# Altium PCB LED_PCB.pcbdoc
Units mil, origin at the board's own origin, x right, y up, seen from the top; angles counter-clockwise.
Board outline 1275.59 x 8110.24 mil, 2 copper layers (Top Layer, Bottom Layer); 100 components, 70 nets, 282 pads, 72 vias.
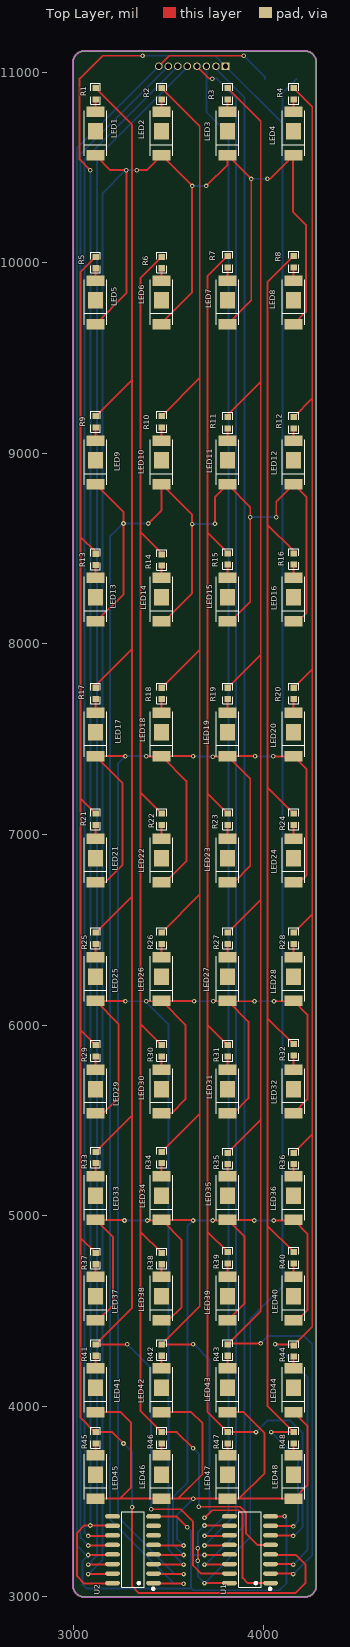
[diagram p0: Top Layer view]
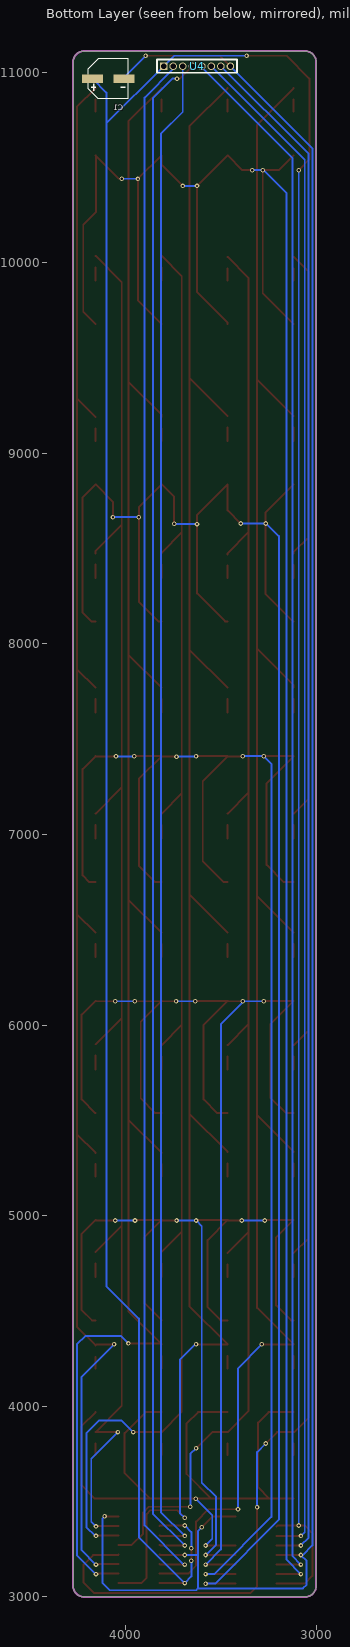
[diagram p1: Bottom Layer view, seen from below]

## Layer stack, top to bottom
Top Solder Mask Layer: solder mask 0.4, Solder Resist, Dk 3.5
Top Layer: signal copper 1.4
Dielectric1: dielectric 12.6, FR-4, Dk 4.8
Bottom Layer: signal copper 1.4
Bottom Solder Mask Layer: solder mask 0.4, Solder Resist, Dk 3.5

## Board outline
3059.06,11110.24 4216.54,11110.24 cw(c4216.54,11051.18) 4275.59,11051.18 4275.59,3059.06 cw(c4216.54,3059.06) 4216.54,3000 3059.06,3000 cw(c3059.06,3059.06) 3000,3059.06 3000,11051.18 cw(c3059.06,11051.18)

## Design rules (kind name [scope] priority, off if disabled: settings)
Clearance [All] p1: gap=10 ignorepadtopadclearanceinfootprint=FALSE except(0: Arc-Hole Track-Hole SMDPad-Hole THPad-Hole Via-Hole Fill-Hole Poly-Hole Region-Hole Text-Hole)
PolygonConnect [All] p1: connectstyle=Relief reliefconductorwidth=10 reliefentries=4 polygonreliefangle="90 Angle" airgapwidth=10
RoutingVias [All] p1: holewidth=28 width=50 viastyle="Through Hole" minholewidth=28 minwidth=50 maxholewidth=28 maxwidth=50
SolderMaskExpansion [All] p1: expansion=4
Width [All] p1: maxlimit=10 minlimit=10 preferedwidth=10
30 further rules are at their usual default settings.

## Components (designator, comment, footprint, x,y, rotation, side; value= is the part's Value field where it differs from the comment)
C1 "EEEFK1H100UR" CAP-SMD_BD5.0-L5.3-W5.3-LS6.0-FD 4090,10964.16 r180 bottom
LED1 "TJ-S5730UG5W9TLC2R-A5" LED-SMD_L5.7-W3.0-R-RD 3118.11,10677.17 r90 top
LED2 "TJ-S5730UG5W9TLC2R-A5" LED-SMD_L5.7-W3.0-R-RD 3464.57,10677.17 r90 top
LED3 "TJ-S5730UG5W9TLC2R-A5" LED-SMD_L5.7-W3.0-R-RD 3811.02,10677.17 r90 top
LED4 "TJ-S5730UG5W9TLC2R-A5" LED-SMD_L5.7-W3.0-R-RD 4157.48,10677.17 r90 top
LED5 "TJ-S5730UG5W9TLC2R-A5" LED-SMD_L5.7-W3.0-R-RD 3118.11,9791.73 r90 top
LED6 "TJ-S5730UG5W9TLC2R-A5" LED-SMD_L5.7-W3.0-R-RD 3464.57,9791.73 r90 top
LED7 "TJ-S5730UG5W9TLC2R-A5" LED-SMD_L5.7-W3.0-R-RD 3811.02,9791.73 r90 top
LED8 "TJ-S5730UG5W9TLC2R-A5" LED-SMD_L5.7-W3.0-R-RD 4157.48,9791.73 r90 top
LED9 "TJ-S5730UG5W9TLC2R-A5" LED-SMD_L5.7-W3.0-R-RD 3118.11,8950.98 r90 top
LED10 "TJ-S5730UG5W9TLC2R-A5" LED-SMD_L5.7-W3.0-R-RD 3464.57,8950.98 r90 top
LED11 "TJ-S5730UG5W9TLC2R-A5" LED-SMD_L5.7-W3.0-R-RD 3811.02,8950.98 r90 top
LED12 "TJ-S5730UG5W9TLC2R-A5" LED-SMD_L5.7-W3.0-R-RD 4157.48,8950.98 r90 top
LED13 "TJ-S5730UG5W9TLC2R-A5" LED-SMD_L5.7-W3.0-R-RD 3118.11,8231.89 r90 top
LED14 "TJ-S5730UG5W9TLC2R-A5" LED-SMD_L5.7-W3.0-R-RD 3464.57,8231.89 r90 top
LED15 "TJ-S5730UG5W9TLC2R-A5" LED-SMD_L5.7-W3.0-R-RD 3811.02,8231.89 r90 top
LED16 "TJ-S5730UG5W9TLC2R-A5" LED-SMD_L5.7-W3.0-R-RD 4157.48,8231.89 r90 top
LED17 "TJ-S5730UG5W9TLC2R-A5" LED-SMD_L5.7-W3.0-R-RD 3118.11,7525.2 r90 top
LED18 "TJ-S5730UG5W9TLC2R-A5" LED-SMD_L5.7-W3.0-R-RD 3464.57,7525.2 r90 top
LED19 "TJ-S5730UG5W9TLC2R-A5" LED-SMD_L5.7-W3.0-R-RD 3811.02,7525.2 r90 top
LED20 "TJ-S5730UG5W9TLC2R-A5" LED-SMD_L5.7-W3.0-R-RD 4157.48,7525.2 r90 top
LED21 "TJ-S5730UG5W9TLC2R-A5" LED-SMD_L5.7-W3.0-R-RD 3118.11,6864.57 r90 top
LED22 "TJ-S5730UG5W9TLC2R-A5" LED-SMD_L5.7-W3.0-R-RD 3464.57,6864.57 r90 top
LED23 "TJ-S5730UG5W9TLC2R-A5" LED-SMD_L5.7-W3.0-R-RD 3811.02,6864.57 r90 top
LED24 "TJ-S5730UG5W9TLC2R-A5" LED-SMD_L5.7-W3.0-R-RD 4157.48,6864.57 r90 top
LED25 "TJ-S5730UG5W9TLC2R-A5" LED-SMD_L5.7-W3.0-R-RD 3118.11,6241.73 r90 top
LED26 "TJ-S5730UG5W9TLC2R-A5" LED-SMD_L5.7-W3.0-R-RD 3464.57,6241.73 r90 top
LED27 "TJ-S5730UG5W9TLC2R-A5" LED-SMD_L5.7-W3.0-R-RD 3811.02,6241.73 r90 top
LED28 "TJ-S5730UG5W9TLC2R-A5" LED-SMD_L5.7-W3.0-R-RD 4157.48,6241.73 r90 top
LED29 "TJ-S5730UG5W9TLC2R-A5" LED-SMD_L5.7-W3.0-R-RD 3118.11,5652.56 r90 top
LED30 "TJ-S5730UG5W9TLC2R-A5" LED-SMD_L5.7-W3.0-R-RD 3464.57,5652.56 r90 top
LED31 "TJ-S5730UG5W9TLC2R-A5" LED-SMD_L5.7-W3.0-R-RD 3811.02,5652.56 r90 top
LED32 "TJ-S5730UG5W9TLC2R-A5" LED-SMD_L5.7-W3.0-R-RD 4157.48,5652.56 r90 top
LED33 "TJ-S5730UG5W9TLC2R-A5" LED-SMD_L5.7-W3.0-R-RD 3118.11,5092.13 r90 top
LED34 "TJ-S5730UG5W9TLC2R-A5" LED-SMD_L5.7-W3.0-R-RD 3464.57,5092.13 r90 top
LED35 "TJ-S5730UG5W9TLC2R-A5" LED-SMD_L5.7-W3.0-R-RD 3811.02,5092.13 r90 top
LED36 "TJ-S5730UG5W9TLC2R-A5" LED-SMD_L5.7-W3.0-R-RD 4157.48,5092.13 r90 top
LED37 "TJ-S5730UG5W9TLC2R-A5" LED-SMD_L5.7-W3.0-R-RD 3118.11,4565.35 r90 top
LED38 "TJ-S5730UG5W9TLC2R-A5" LED-SMD_L5.7-W3.0-R-RD 3464.57,4565.35 r90 top
LED39 "TJ-S5730UG5W9TLC2R-A5" LED-SMD_L5.7-W3.0-R-RD 3811.02,4565.35 r90 top
LED40 "TJ-S5730UG5W9TLC2R-A5" LED-SMD_L5.7-W3.0-R-RD 4157.48,4565.35 r90 top
LED41 "TJ-S5730UG5W9TLC2R-A5" LED-SMD_L5.7-W3.0-R-RD 3118.11,4084.65 r90 top
LED42 "TJ-S5730UG5W9TLC2R-A5" LED-SMD_L5.7-W3.0-R-RD 3464.57,4084.65 r90 top
LED43 "TJ-S5730UG5W9TLC2R-A5" LED-SMD_L5.7-W3.0-R-RD 3811.02,4084.65 r90 top
LED44 "TJ-S5730UG5W9TLC2R-A5" LED-SMD_L5.7-W3.0-R-RD 4157.48,4084.65 r90 top
LED45 "TJ-S5730UG5W9TLC2R-A5" LED-SMD_L5.7-W3.0-R-RD 3118.11,3629.92 r90 top
LED46 "TJ-S5730UG5W9TLC2R-A5" LED-SMD_L5.7-W3.0-R-RD 3464.57,3629.92 r90 top
LED47 "TJ-S5730UG5W9TLC2R-A5" LED-SMD_L5.7-W3.0-R-RD 3811.02,3629.92 r90 top
LED48 "TJ-S5730UG5W9TLC2R-A5" LED-SMD_L5.7-W3.0-R-RD 4157.48,3629.92 r90 top
R1 "0603WAF1100T5E" R0603 3118.11,10885.83 r90 top
R2 "0603WAF1100T5E" R0603 3464.57,10885.83 r90 top
R3 "0603WAF1100T5E" R0603 3811.02,10885.83 r90 top
R4 "0603WAF1100T5E" R0603 4157.48,10885.83 r90 top
R5 "0603WAF1100T5E" R0603 3118.11,10000.24 r90 top
R6 "0603WAF1100T5E" R0603 3464.57,10000.24 r90 top
R7 "0603WAF1100T5E" R0603 3811.02,10005.24 r90 top
R8 "0603WAF1100T5E" R0603 4157.48,10005.24 r90 top
R9 "0603WAF1100T5E" R0603 3118.11,9165.24 r90 top
R10 "0603WAF1100T5E" R0603 3464.57,9165.24 r90 top
R11 "0603WAF1100T5E" R0603 3811.02,9160.24 r90 top
R12 "0603WAF1100T5E" R0603 4157.48,9160.24 r90 top
R13 "0603WAF1100T5E" R0603 3118.11,8443.27 r90 top
R14 "0603WAF1100T5E" R0603 3464.57,8440.24 r90 top
R15 "0603WAF1100T5E" R0603 3811.02,8445.24 r90 top
R16 "0603WAF1100T5E" R0603 4157.48,8445.24 r90 top
R17 "0603WAF1100T5E" R0603 3118.11,7740.24 r90 top
R18 "0603WAF1100T5E" R0603 3464.57,7740.24 r90 top
R19 "0603WAF1100T5E" R0603 3811.02,7740.24 r90 top
R20 "0603WAF1100T5E" R0603 4157.48,7740.24 r90 top
R21 "0603WAF1100T5E" R0603 3118.11,7080.24 r90 top
R22 "0603WAF1100T5E" R0603 3464.57,7080.24 r90 top
R23 "0603WAF1100T5E" R0603 3811.02,7080.24 r90 top
R24 "0603WAF1100T5E" R0603 4157.48,7080.24 r90 top
R25 "0603WAF1100T5E" R0603 3118.11,6455.24 r90 top
R26 "0603WAF1100T5E" R0603 3464.57,6455.24 r90 top
R27 "0603WAF1100T5E" R0603 3811.02,6455.24 r90 top
R28 "0603WAF1100T5E" R0603 4157.48,6455.24 r90 top
R29 "0603WAF1100T5E" R0603 3118.11,5865.24 r90 top
R30 "0603WAF1100T5E" R0603 3464.57,5865.24 r90 top
R31 "0603WAF1100T5E" R0603 3811.02,5865.24 r90 top
R32 "0603WAF1100T5E" R0603 4157.48,5870.24 r90 top
R33 "0603WAF1100T5E" R0603 3118.11,5305.24 r90 top
R34 "0603WAF1100T5E" R0603 3464.57,5305.24 r90 top
R35 "0603WAF1100T5E" R0603 3811.02,5300.24 r90 top
R36 "0603WAF1100T5E" R0603 4157.48,5300.24 r90 top
R37 "0603WAF1100T5E" R0603 3118.11,4775.24 r90 top
R38 "0603WAF1100T5E" R0603 3464.57,4775.24 r90 top
R39 "0603WAF1100T5E" R0603 3811.02,4780.24 r90 top
R40 "0603WAF1100T5E" R0603 4157.48,4780.24 r90 top
R41 "0603WAF1100T5E" R0603 3118.11,4295.24 r90 top
R42 "0603WAF1100T5E" R0603 3464.57,4295.24 r90 top
R43 "0603WAF1100T5E" R0603 3811.02,4295.24 r90 top
R44 "0603WAF1100T5E" R0603 4157.48,4290.24 r90 top
R45 "0603WAF1100T5E" R0603 3118.11,3835.24 r90 top
R46 "0603WAF1100T5E" R0603 3464.57,3835.24 r90 top
R47 "0603WAF1100T5E" R0603 3811.02,3835.24 r90 top
R48 "0603WAF1100T5E" R0603 4157.48,3835.24 r90 top
U1 "74HC595D_C431479" SOIC-16_L9.9-W3.9-P1.27-LS6.0-BL 3928.51,3248.03 r90 top
U2 "74HC595D_C431479" SOIC-16_L9.9-W3.9-P1.27-LS6.0-BL 3315,3248.03 r90 top
U4 "排母1*8P" HDR-TH_8P-P1.27-V-F 3625,11030.24 r180 bottom

## Footprints (in the part's own frame and the unit in brackets; to place one, negate y for a bottom-side part, rotate by r counter-clockwise, add the part's x,y. Pads: shape width x height; smd on the part's side, far side on the other; paste and mask are expansions set on the pad)
CAP-SMD_BD5.0-L5.3-W5.3-LS6.0-FD [mm]
  rect 2.8x1.1 smd mask+0.051: 1(-2.1,0) 2(2.1,0)
  silkscreen extent -2.66,-2.62 2.66,2.65
HDR-TH_8P-P1.27-V-F [mm]
  rect 1x1 hole 0.7 mask+0.051: 1(-4.445,0)
  round 1 hole 0.7 mask+0.051: 2(-3.175,0) 3(-1.905,0) 4(-0.635,0) 5(0.635,0) 6(1.905,0) 7(3.175,0) 8(4.445,0)
  silkscreen extent -5.31,-0.87 5.31,0.92
LED-SMD_L5.7-W3.0-R-RD [mm]
  rect 1.4x2.4 smd mask+0.051: 1(2.9,0) 2(-2.9,0)
  rect 2.2x2 smd mask+0.051: 3(0.3,0)
  silkscreen extent -2.96,-1.5 3.04,1.5
R0603 [mil]
  rect 31.75x34.02 smd paste-3937.01 mask+2: 1(-29.66,0) 2(29.66,0)
  silkscreen extent -55,-26 55,26
SOIC-16_L9.9-W3.9-P1.27-LS6.0-BL [mil]
  oval 23.7x77.6 smd mask+2: 1(-175,-107.7) 2(-125,-107.7) 3(-75,-107.7) 4(-25,-107.7) 5(25,-107.7) 6(75,-107.7) 7(125,-107.7) 8(175,-107.7) 9(175,107.7) 10(125,107.7) 11(75,107.7) 12(25,107.7) 13(-25,107.7) 14(-75,107.7) 15(-125,107.7) 16(-175,107.7)
  silkscreen extent -211,-111 198,60

## Via types
v1: diameter 24, hole 12, Top Layer to Bottom Layer, 72 vias

## Nets (pads, with @x,y where several pads share a name; then routed paths per layer and width w, separated by ;. In a path a pad name is that pad's centre, name@x,y a point inside that pad or via, vN(x,y) a via of type N, cw(c..) or ccw(c..) an arc to the next point about the centre after c; other vN are vias at no path point)
$1N2251: LED1.1 R1.1 | length 64.8
  Top Layer w10: LED1.1 R1.1
$1N2333: LED2.1 R2.1 | length 64.8
  Top Layer w10: LED2.1 R2.1
$1N2497: LED3.1 R3.1 | length 64.8
  Top Layer w10: LED3.1 R3.1
$1N2499: LED4.1 R4.1 | length 64.8
  Top Layer w10: LED4.1 R4.1
$1N2832: LED5.1 R5.1 | length 64.7
  Top Layer w10: LED5.1 R5.1
$1N2834: LED6.1 R6.1 | length 64.7
  Top Layer w10: LED6.1 R6.1
$1N2836: LED7.1 R7.1 | length 69.7
  Top Layer w10: LED7.1 R7.1
$1N2838: LED8.1 R8.1 | length 69.7
  Top Layer w10: LED8.1 R8.1
$1N3164: LED9.1 R9.1 | length 70.4
  Top Layer w10: LED9.1 R9.1
$1N3166: LED10.1 R10.1 | length 70.4
  Top Layer w10: LED10.1 R10.1
$1N3168: LED11.1 R11.1 | length 65.4
  Top Layer w10: LED11.1 R11.1
$1N3170: LED12.1 R12.1 | length 65.4
  Top Layer w10: LED12.1 R12.1
$1N3496: LED13.1 R13.1 | length 67.5
  Top Layer w10: LED13.1 R13.1
$1N3498: LED14.1 R14.1 | length 64.5
  Top Layer w10: LED14.1 R14.1
$1N3500: LED15.1 R15.1 | length 69.5
  Top Layer w10: LED15.1 R15.1
$1N3502: LED16.1 R16.1 | length 69.5
  Top Layer w10: LED16.1 R16.1
$1N4800: LED17.1 R17.1 | length 71.2
  Top Layer w10: LED17.1 R17.1
$1N4802: LED18.1 R18.1 | length 71.2
  Top Layer w10: LED18.1 R18.1
$1N4804: LED19.1 R19.1 | length 71.2
  Top Layer w10: LED19.1 R19.1
$1N4806: LED20.1 R20.1 | length 71.2
  Top Layer w10: LED20.1 R20.1
$1N4808: LED21.1 R21.1 | length 71.8
  Top Layer w10: LED21.1 R21.1
$1N4810: LED22.1 R22.1 | length 71.8
  Top Layer w10: LED22.1 R22.1
$1N4812: LED23.1 R23.1 | length 71.8
  Top Layer w10: LED23.1 R23.1
$1N4814: LED24.1 R24.1 | length 71.8
  Top Layer w10: LED24.1 R24.1
$1N4816: LED25.1 R25.1 | length 69.7
  Top Layer w10: LED25.1 R25.1
$1N4818: LED26.1 R26.1 | length 69.7
  Top Layer w10: LED26.1 R26.1
$1N4820: LED27.1 R27.1 | length 69.7
  Top Layer w10: LED27.1 R27.1
$1N4822: LED28.1 R28.1 | length 69.7
  Top Layer w10: LED28.1 R28.1
$1N4824: LED29.1 R29.1 | length 68.8
  Top Layer w10: LED29.1 R29.1
$1N4826: LED30.1 R30.1 | length 68.8
  Top Layer w10: LED30.1 R30.1
$1N4828: LED31.1 R31.1 | length 68.8
  Top Layer w10: LED31.1 R31.1
$1N4830: LED32.1 R32.1 | length 73.8
  Top Layer w10: LED32.1 R32.1
$1N6128: LED33.1 R33.1 | length 69.3
  Top Layer w10: LED33.1 R33.1
$1N6130: LED34.1 R34.1 | length 69.3
  Top Layer w10: LED34.1 R34.1
$1N6132: LED35.1 R35.1 | length 64.3
  Top Layer w10: LED35.1 R35.1
$1N6134: LED36.1 R36.1 | length 64.3
  Top Layer w10: LED36.1 R36.1
$1N6136: LED37.1 R37.1 | length 66
  Top Layer w10: LED37.1 R37.1
$1N6138: LED38.1 R38.1 | length 66
  Top Layer w10: LED38.1 R38.1
$1N6140: LED39.1 R39.1 | length 71
  Top Layer w10: LED39.1 R39.1
$1N6142: LED40.1 R40.1 | length 71
  Top Layer w10: LED40.1 R40.1
$1N6144: LED41.1 R41.1 | length 66.8
  Top Layer w10: LED41.1 R41.1
$1N6146: LED42.1 R42.1 | length 66.8
  Top Layer w10: LED42.1 R42.1
$1N6148: LED43.1 R43.1 | length 66.8
  Top Layer w10: LED43.1 R43.1
$1N6150: LED44.1 R44.1 | length 61.8
  Top Layer w10: LED44.1 R44.1
$1N6152: LED45.1 R45.1 | length 61.5
  Top Layer w10: LED45.1 R45.1
$1N6154: LED46.1 R46.1 | length 61.5
  Top Layer w10: LED46.1 R46.1
$1N6156: LED47.1 R47.1 | length 61.5
  Top Layer w10: LED47.1 R47.1
$1N6158: LED48.1 R48.1 | length 61.5
  Top Layer w10: LED48.1 R48.1
$1N6799: LED1.2 LED2.2 LED3.2 LED4.2 LED5.2 LED6.2 LED7.2 LED8.2 U2.15 | length 12362.5
  Top Layer w10: v1(3080,3120.24) U2.15@3207.3,3120.24 ; LED5.2 3280,9839.45 v1(3280,10485.24) 3195.86,10485.24 LED1.2 ; v1(3335,10485.24) 3386.81,10485.24 LED2.2 v1(3625,10402.56) 3625,9845.24 3464.57,9684.8 LED6.2 ; v1(3699.39,10402.56) 3811.02,10514.19 LED3.2 v1(3935,10439.01) 3935,9801.53 LED7.2 ; v1(4020,10440.24) 4034.73,10440.24 LED4.2@4155,10560.51 ; LED8.2 4222,9742.08 4222,10198.24 4155,10265.24 LED4.2@4155,10560.51 ; LED4.2 LED4.2@4155,10560.51
  Bottom Layer w10: v1(3080,3120.24) 3155,3195.24 3155,10365.24 3275,10485.24 v1(3280,10485.24) v1(3335,10485.24) ; v1(3625,10402.56) v1(3699.39,10402.56) ; v1(3935,10439.01) 3936.22,10440.24 v1(4020,10440.24)
$1N6885: LED9.2 LED10.2 LED11.2 LED12.2 LED13.2 LED14.2 LED15.2 LED16.2 U2.1 | length 10321.5
  Top Layer w10: LED13.2 3122.48,8117.71 3265,8260.24 v1(3265,8631.38) 3265,8689.92 LED9.2 ; v1(3395.38,8631.38) 3464.57,8700.57 LED10.2 3625,8676.38 v1(3625,8628.53) 3625,8265.24 3477.48,8117.71 LED14.2 ; U2.1@3422.7,3070.24 v1(3580,3070.24) ; v1(3745,8630.24) 3745,8770.79 LED11.2 3930,8717.83 v1(3930,8664.95) 3930,8220.24 3827.48,8117.71 LED15.2 ; v1(4066.18,8664.95) 4066.18,8745.51 LED12.2 4225,8769.29 4225,8163.24 4179.48,8117.71 LED16.2
  Bottom Layer w10: v1(3395.38,8631.38) v1(3265,8631.38) 3261.15,8631.38 3195,8565.24 3195,3405.24 3530,3070.24 v1(3580,3070.24) ; v1(3625,8628.53) 3743.29,8628.53 v1(3745,8630.24) ; v1(3930,8664.95) v1(4066.18,8664.95)
$1N6989: LED17.2 LED18.2 LED19.2 LED20.2 LED21.2 LED22.2 LED23.2 LED24.2 U2.2 | length 8780.9
  Top Layer w10: LED21.2 3170.16,6750.39 3260,6840.24 3260,7269.13 LED17.2 v1(3275,7411.02) ; v1(3385,7410.24) 3463.78,7410.24 LED18.2 ; U2.2@3422.7,3120.24 v1(3580,3120.24) ; LED22.2 3485.16,6750.39 3595,6860.24 3595,7280.59 LED18.2 ; v1(3630,7410.24) 3629.21,7411.02 LED18.2 ; v1(3732.5,7408.61) 3808.61,7408.61 LED19.2 ; LED23.2 3845.16,6750.39 3930,6835.24 3930,7292.05 LED19.2 ; v1(3955,7410.24) 3954.21,7411.02 LED19.2 ; v1(4050,7410.24) 4156.69,7410.24 LED20.2 4225,7343.5 4225,6785.24 4190.16,6750.39 LED24.2
  Bottom Layer w10: v1(3385,7410.24) 3384.21,7411.02 v1(3275,7411.02) 3275,7410.24 3235,7370.24 3235,3420.24 3535,3120.24 v1(3580,3120.24) ; v1(3630,7410.24) 3730.87,7410.24 v1(3732.5,7408.61) ; v1(3955,7410.24) v1(4050,7410.24)
$1N7119: LED25.2 LED26.2 LED27.2 LED28.2 LED29.2 LED30.2 LED31.2 LED32.2 U2.3 | length 7022.4
  Top Layer w10: LED29.2 3158.15,5538.38 3240,5620.24 3240,6005.67 LED25.2 3272.68,6127.56 v1(3275,6125.24) ; v1(3385,6125.24) 3462.25,6125.24 LED26.2 ; U2.3@3422.7,3170.24 v1@3580,3170.24 ; LED30.2 3518.15,5538.38 3590,5610.24 3590,6002.12 LED26.2 ; v1(3635,6125.24) 3632.68,6127.56 LED26.2 ; v1(3735,6125.24) LED27.2@3808.7,6125.24 ; LED31.2 3843.15,5538.38 3920,5615.24 3920,6018.58 LED27.2@3813.34,6125.24 ; LED27.2 LED27.2@3808.7,6125.24 ; v1(3952.18,6125.24) LED27.2@3813.34,6125.24 ; v1(4054.43,6125.24) 4155.16,6125.24 LED28.2 4230,6055.04 4230,5610.24 4158.15,5538.38 LED32.2 ; LED27.2@3808.7,6125.24 LED27.2@3813.34,6125.24
  Bottom Layer w10: v1(3275,6125.24) v1(3385,6125.24) 3385,6120.24 3500,6005.24 3500,3250.07 v1(3580,3170.07) ; v1(3635,6125.24) v1(3735,6125.24) ; v1(3952.18,6125.24) v1(4054.43,6125.24)
$1N7230: LED33.2 LED34.2 LED35.2 LED36.2 LED37.2 LED38.2 LED39.2 LED40.2 U2.4 | length 5468.7
  Top Layer w10: LED37.2 3130.94,4451.18 3210,4530.24 3210,4886.06 LED33.2 3267.29,4977.95 v1(3270,4975.24) ; v1(3390,4975.24) 3461.85,4975.24 LED34.2 ; U2.4@3422.7,3220.24 v1(3580,3220.24) ; LED38.2 3500.94,4451.18 3570,4520.24 3570,4872.52 LED34.2 ; v1(3630,4975.24) 3627.29,4977.95 LED34.2 ; v1(3732.45,4975.24) 3808.31,4975.24 LED35.2 ; LED39.2 3900,4540.16 3900,4888.97 LED35.2 ; v1(3950.47,4975.24) 3947.76,4977.95 LED35.2 ; v1(4053.57,4975.24) 4154.77,4975.24 LED36.2 4230,4905.43 4230,4505.24 4175.94,4451.18 LED40.2
  Bottom Layer w10: v1(3270,4975.24) v1(3390,4975.24) ; v1(3580,3220.24) 3525,3275.24 3525,3525.24 3600,3600.24 3600,4945.24 v1(3630,4975.24) v1(3732.45,4975.24) ; v1(3950.47,4975.24) v1(4053.57,4975.24)
$1N7317: LED41.2 LED42.2 LED43.2 LED44.2 LED45.2 LED46.2 LED47.2 LED48.2 U2.5 | length 3971.3
  Top Layer w10: LED45.2 3245.51,3515.75 ; LED41.2 3249.77,3970.47 3305,3915.24 3305,3575.24 3245.51,3515.75 ; U2.5@3422.7,3270.24 v1(3580,3270.24) ; LED42.2 3619.77,3970.47 3680,3910.24 3680,3645.24 3550.51,3515.75 ; LED43.2 3894.77,3970.47 4005,3860.24 4005,3650.24 3870.51,3515.75 ; LED44.2 4230,3897.95 4230,3585.24 4160.51,3515.75 LED48.2 3870.51,3515.75 ; 3245.51,3515.75 LED46.2 3550.51,3515.75 ; 3550.51,3515.75 v1(3631.38,3515.75) LED47.2 3870.51,3515.75
  Bottom Layer w10: v1(3580,3270.24) 3545,3305.24 3545,3429.37 v1(3631.38,3515.75)
$1N7433: R1.2 R9.2 R17.2 R25.2 R33.2 R41.2 U1.15 | length 9617
  Top Layer w10: R41.2 R41.2@3118.45,4325.24 ; R33.2 3310,5526.79 ; R25.2 3310,6676.79 ; R17.2 3118.11,7783.35 3310,7975.24 ; R9.2 3310,9386.79 ; R1.2 3310,10723.6 3310,9386.79 ; v1(3285,4325.24) R41.2@3118.45,4325.24 ; v1(3410,3460.24) 3565,3460.24 3630,3395.24 3630,3165.24 3672.2,3123.03 U1.15 ; R41.2@3118.45,4325.24 3310,4516.79 3310,5526.79 ; 3310,5526.79 3310,6676.79 ; 3310,6676.79 3310,7975.24 ; 3310,7975.24 3310,9386.79
  Bottom Layer w10: v1(3285,4325.24) 3410,4200.24 v1(3410,3460.24)
$1N7550: R5.2 R13.2 R21.2 R29.2 R37.2 R45.2 U1.4 | length 8870.6
  Top Layer w10: R37.2 3040,4883.01 ; R29.2 3040,5973.01 ; R21.2 3040,7188.01 ; R13.2 3118.11,8482.13 3040,8560.24 ; R5.2 3040,9951.79 3040,8560.24 ; v1(3265,3805.24) 3205.34,3864.9 R45.2 3115.34,3864.9 3040,3940.24 3040,4883.01 ; v1(3310,3470.24) 3310,3055.24 3345,3020.24 4165,3020.24 4220,3075.24 4220,3170.24 4170,3220.24 4039.01,3220.24 U1.4 ; 3040,4883.01 3040,5973.01 ; 3040,5973.01 3040,7188.01 ; 3040,7188.01 3040,8560.24
  Bottom Layer w10: v1(3265,3805.24) 3310,3760.24 v1(3310,3470.24)
$1N7634: R2.2 R10.2 R18.2 R26.2 R34.2 R42.2 U1.1 | length 9731.9
  Top Layer w10: R34.2 3665,5535.33 ; R26.2 3665,6685.33 ; R18.2 3665,7970.33 ; R10.2 3665,9395.33 ; R2.2 3665,10715.05 3665,9395.33 ; v1(3630,4325.24) 3629.66,4324.9 R42.2 3665,4525.33 3665,5535.33 ; v1(3690,3415.24) 3730,3455.24 3870,3455.24 3890,3435.24 3890,3100.24 3917.2,3073.03 U1.1 ; 3665,5535.33 3665,6685.33 ; 3665,6685.33 3665,7970.33 ; 3665,7970.33 3665,9395.33
  Bottom Layer w10: v1(3630,4325.24) 3635,4325.24 3715,4245.24 3715,3440.24 v1(3690,3415.24)
$1N7744: R6.2 R14.2 R22.2 R30.2 R38.2 R46.2 U1.5 | length 7925.1
  Top Layer w10: R38.2 3355,4914.46 ; R30.2 3355,6004.46 ; R22.2 3355,7219.46 ; R14.2 3464.57,8475.67 3355,8585.24 ; R6.2 3355,9920.33 3355,8585.24 ; v1(3630,3780.24) 3545.34,3864.9 R46.2 3355,3974.46 3355,4914.46 ; v1(3660,3473.24) 3877.46,3473.24 3908,3442.69 3908,3332.24 3967.2,3273.03 U1.5 ; 3355,4914.46 3355,6004.46 ; 3355,6004.46 3355,7219.46 ; 3355,7219.46 3355,8585.24
  Bottom Layer w10: v1(3630,3780.24) 3660,3750.24 v1(3660,3473.24)
$1N7853: R3.2 R11.2 R19.2 R27.2 R35.2 R43.2 U1.2 | length 9570.4
  Top Layer w10: R43.2 R43.2@3816.36,4330.24 ; R35.2 3985,5503.87 ; R27.2 3985,6658.87 ; R19.2 3985,7943.87 ; R11.2 3811.02,9201.26 3985,9375.24 ; R3.2 3985,10741.51 3985,9375.24 ; v1(3985,4330.24) R43.2@3816.36,4330.24 ; U1.2 4152.2,3123.03 v1(4155,3120.24) ; R43.2@3816.36,4330.24 3985,4498.87 3985,5503.87 ; 3985,5503.87 3985,6658.87 ; 3985,6658.87 3985,7943.87 ; 3985,7943.87 3985,9375.24
  Bottom Layer w10: v1(3985,4330.24) 4025,4370.24 4210,4370.24 4255,4325.24 4255,3220.24 v1(4155,3120.24)
$1N7962: R7.2 R15.2 R23.2 R31.2 R39.2 R47.2 U1.6 | length 7991.4
  Top Layer w10: R39.2 3705,4915.92 ; R31.2 3705,6000.92 ; R23.2 3705,7215.92 ; R15.2 3811.02,8479.21 3705,8585.24 ; R7.2 3705,9928.87 3705,8585.24 ; v1(3960,3865.24) 3811.36,3865.24 R47.2 3705,3970.92 3705,4915.92 ; U1.6 4152.2,3323.03 v1(4155,3320.24) ; 3705,4915.92 3705,6000.92 ; 3705,6000.92 3705,7215.92 ; 3705,7215.92 3705,8585.24
  Bottom Layer w10: v1(3960,3865.24) 4020,3925.24 4140,3925.24 4205,3860.24 4205,3365.24 4160,3320.24 v1(4155,3320.24)
$1N8071: R4.2 R12.2 R20.2 R28.2 R36.2 R44.2 U1.3 | length 8704.2
  Top Layer w10: U1.3 4152.2,3173.03 v1(4155,3170.24) ; v1(4060,4325.24) 4152.14,4325.24 R44.2 4255,4417.42 4255,5427.42 ; R36.2 4255,5427.42 ; R28.2 4255,6582.42 ; R20.2 4255,7867.42 ; R12.2 4255,9287.42 ; R4.2 4255,10817.97 4255,9287.42 ; 4255,5427.42 4255,6582.42 ; 4255,6582.42 4255,7867.42 ; 4255,7867.42 4255,9287.42
  Bottom Layer w10: v1(4060,4325.24) 4230,4155.24 4230,3245.24 v1(4155,3170.24)
$1N8180: R8.2 R16.2 R24.2 R32.2 R40.2 R48.2 U1.7 | length 7874.9
  Top Layer w10: U1.7 4152.2,3373.03 v1(4155,3370.24) ; v1(4040,3865.24) R48.2@4157.14,3865.24 ; R48.2 R48.2@4157.14,3865.24 ; R40.2 4020,4947.38 ; R32.2 4020,6037.38 ; R24.2 4020,7247.38 ; R16.2 4157.48,8487.76 4020,8625.24 ; R8.2 4020,9897.42 4020,8625.24 ; 4020,4947.38 4020,6037.38 ; 4020,4947.38 4020,4002.38 R48.2@4157.14,3865.24 ; 4020,6037.38 4020,7247.38 ; 4020,7247.38 4020,8625.24
  Bottom Layer w10: v1(4040,3865.24) 4180,3725.24 4180,3395.24 v1(4155,3370.24)
$1N8375: U1.14 U4.2 | length 8144
  Top Layer w10: v1(3690,3170.24) 3818.02,3170.24 U1.14
  Bottom Layer w10: v1(3690,3170.24) 3695,3170.24 3900,3375.24 3900,10866.09 3750,11016.09 U4.2
$1N8395: U1.12 U4.4 | length 8068.7
  Top Layer w10: U4.4 3715,10965.24 v1(3730,10965.24) ; v1(3690,3270.24) 3818.02,3270.24 U1.12
  Bottom Layer w10: v1(3690,3270.24) 3855,3435.24 3855,10865.24 3755,10965.24 v1(3730,10965.24)
$1N8400: U1.11 U4.3 | length 7941.4
  Top Layer w10: v1(3690,3320.24) 3818.02,3320.24 U1.11
  Bottom Layer w10: v1(3690,3320.24) 3815,3445.24 3815,10675.24 3700,10790.24 U4.3
$1N8434: U2.14 U4.5 | length 8202.7
  Top Layer w10: v1(3080,3170.24) U2.14@3207.3,3170.24
  Bottom Layer w10: v1(3080,3170.24) 3125,3215.24 3125,10550.24 3600,11025.24 U4.5
$1N8452: U2.12 U4.7 | length 8094.4
  Top Layer w10: v1(3080,3270.24) U2.12@3207.3,3270.24
  Bottom Layer w10: v1(3080,3270.24) 3040,3310.24 3040,10570.24 U4.7
$1N8469: U2.11 U4.6 | length 8048.5
  Top Layer w10: v1(3080,3320.24) U2.11@3207.3,3320.24
  Bottom Layer w10: v1(3080,3320.24) 3060,3340.24 3060,10540.24 U4.6
GND: C1.2 U1.8 U1.13 U2.8 U2.13 U4.8 | length 11206.5
  Top Layer w10: v1(3080,3220.24) U2.13@3207.3,3220.24 ; U2.8 3542.2,3423.03 v1(3600,3365.24) ; U4.8 3505,11085.24 v1(3895,11085.24) ; v1(3690,3220.24) 3818.02,3220.24 U1.13 ; U1.8 v1(4110,3423.03)
  Bottom Layer w10: U4.8 3020,10600.24 3020,3270.24 3070,3220.24 v1(3080,3220.24) 3050,3190.24 3050,3065.24 3070,3045.24 3620,3045.24 ; v1(3600,3365.24) 3620,3345.24 3620,3220.24 ; v1(3690,3220.24) 3620,3220.24 ; v1(3895,11085.24) 4007.32,10972.91 C1.2 ; v1(4110,3423.03) 4120,3413.03 4120,3072.92 4082.32,3035.24 3630,3035.24 3620,3045.24 ; 3620,3045.24 3620,3220.24
VCC: C1.1 U1.10 U1.16 U2.10 U2.16 U4.1 | length 18194.6
  Top Layer w10: v1(3091.2,10485.24) 3035,10541.43 3035,10965.24 3155,11085.24 v1(3365,11085.24) ; U2.16@3207.3,3070.24 3060,3070.24 3020,3110.24 3020,3335.24 3060,3375.24 v1(3091.2,3375.24) 3202.3,3375.24 U2.10@3207.3,3370.24 ; v1(3655,3190.24) v1(3655,3255.24) ; v1(3690,3073.03) U1.16 ; v1(3690,3375.24) 3818.61,3375.24 U1.10
  Bottom Layer w10: v1(3091.2,3375.24) v1(3091.2,10485.24) ; v1(3365,11085.24) 3745,11085.24 U4.1 4100,10730.24 ; v1(3655,3190.24) 3655,3108.03 v1(3690,3073.03) 3930,3313.03 3930,4460.24 4100,4630.24 4100,10730.24 ; v1(3655,3255.24) 3655,3340.24 v1(3690,3375.24) ; C1.1 4100,10891.48 4100,10730.24
pads on no net: LED1.3 LED2.3 LED3.3 LED4.3 LED5.3 LED6.3 LED7.3 LED8.3 LED9.3 LED10.3 LED11.3 LED12.3 LED13.3 LED14.3 LED15.3 LED16.3 LED17.3 LED18.3 LED19.3 LED20.3 LED21.3 LED22.3 LED23.3 LED24.3 LED25.3 LED26.3 LED27.3 LED28.3 LED29.3 LED30.3 LED31.3 LED32.3 LED33.3 LED34.3 LED35.3 LED36.3 LED37.3 LED38.3 LED39.3 LED40.3 LED41.3 LED42.3 LED43.3 LED44.3 LED45.3 LED46.3 LED47.3 LED48.3 U1.9 U2.6 U2.7 U2.9

## Keep-outs
Board Outline Layer:
  the board outline again, w10